# Altium PCB PCB_Project.PcbDoc
Units mil, origin at the board's own origin, x right, y up, seen from the top; angles counter-clockwise.
Board outline 7955 x 4970 mil, 2 copper layers (Top Layer, Bottom Layer); 52 components, 60 nets, 154 pads, 24 vias.
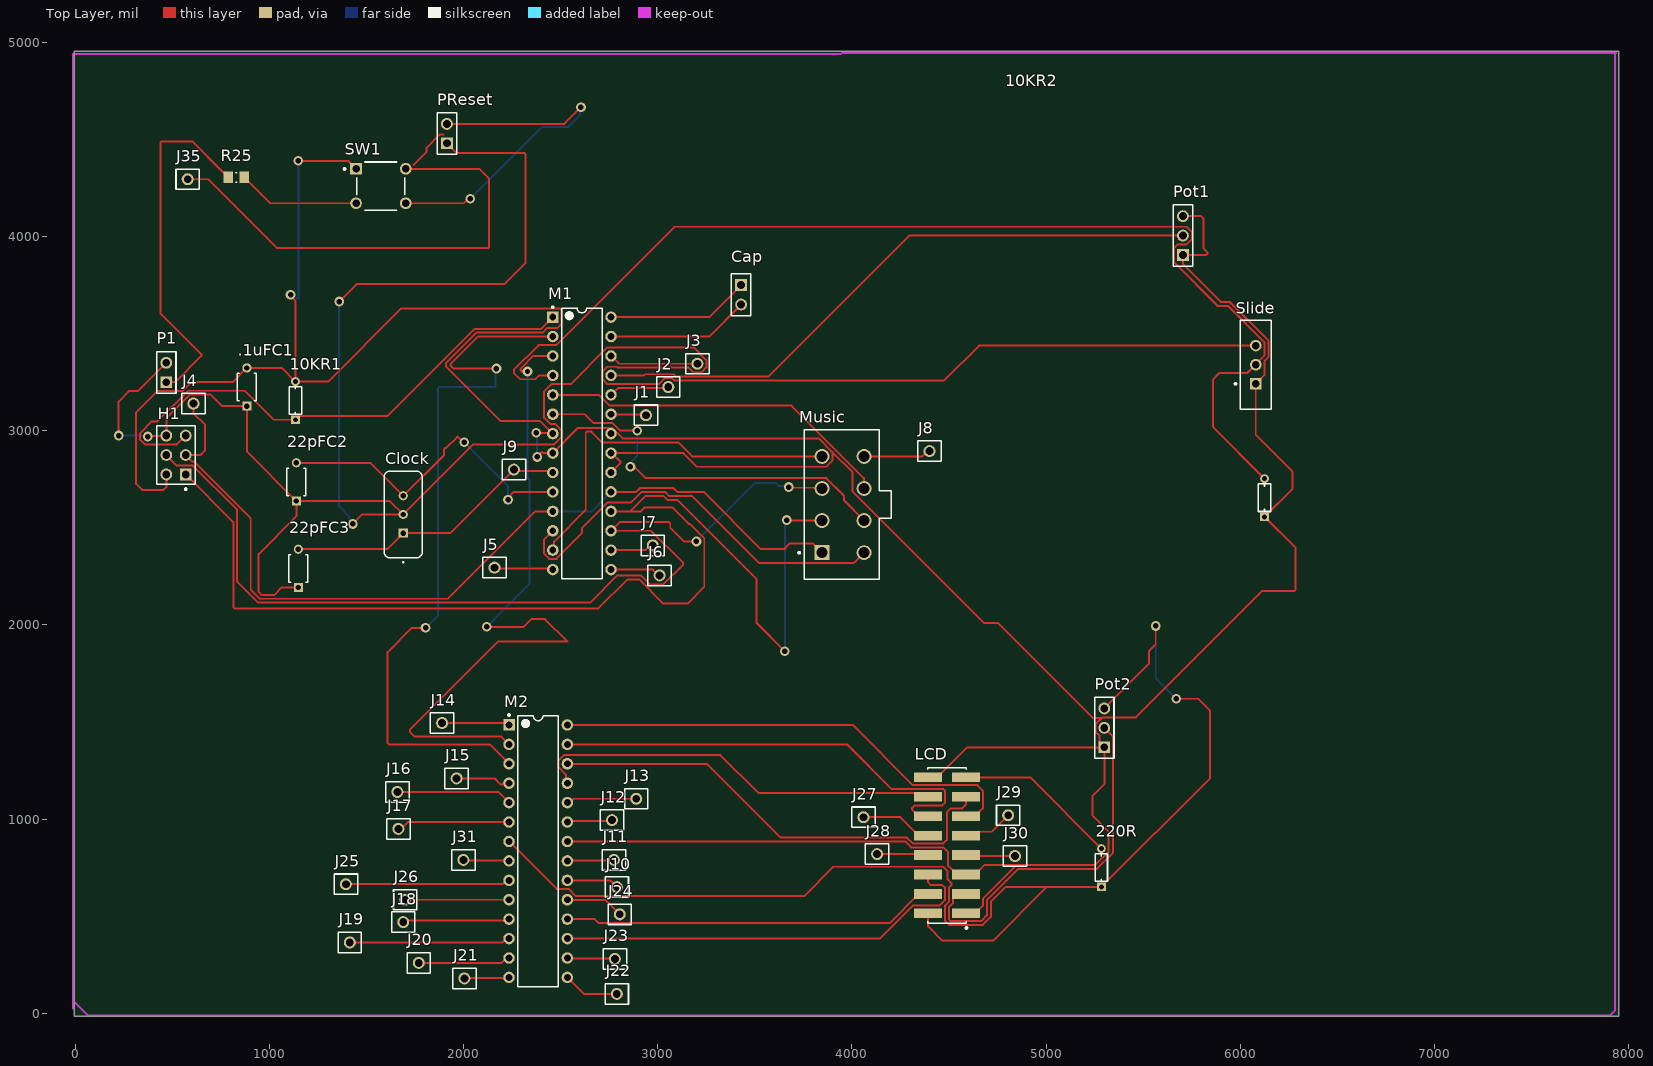
[diagram p0: Top Layer view]
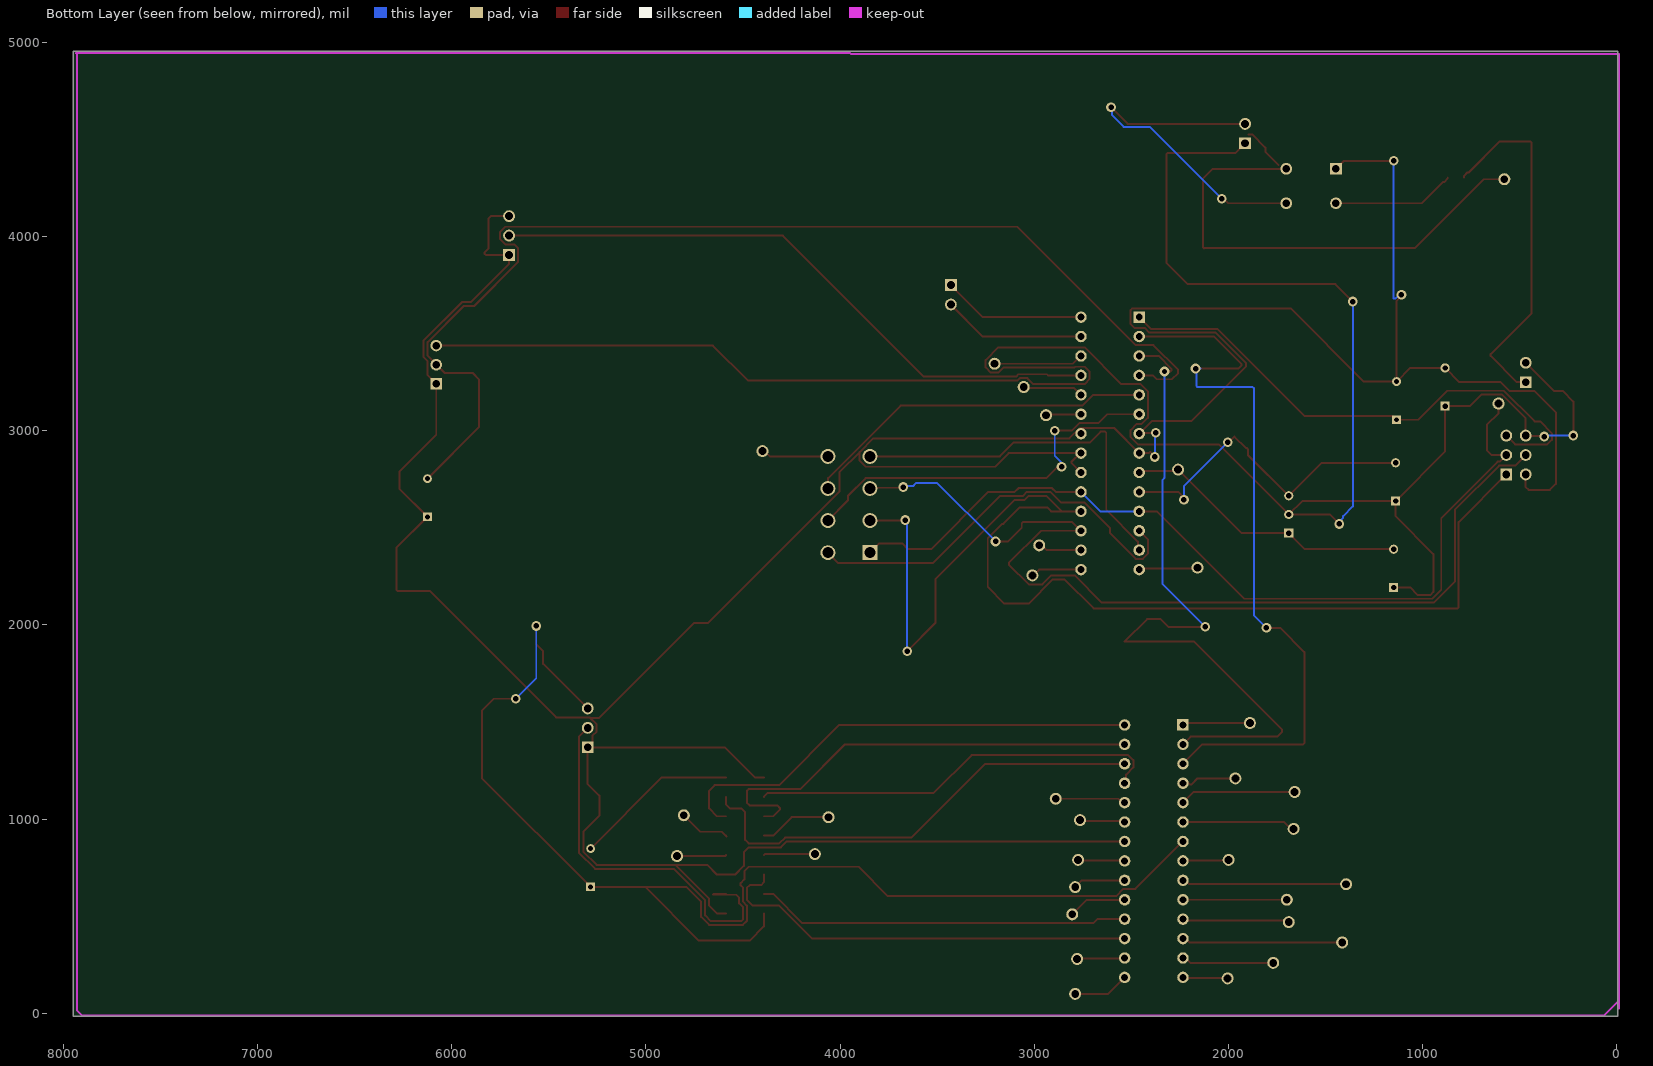
[diagram p1: Bottom Layer view, seen from below]
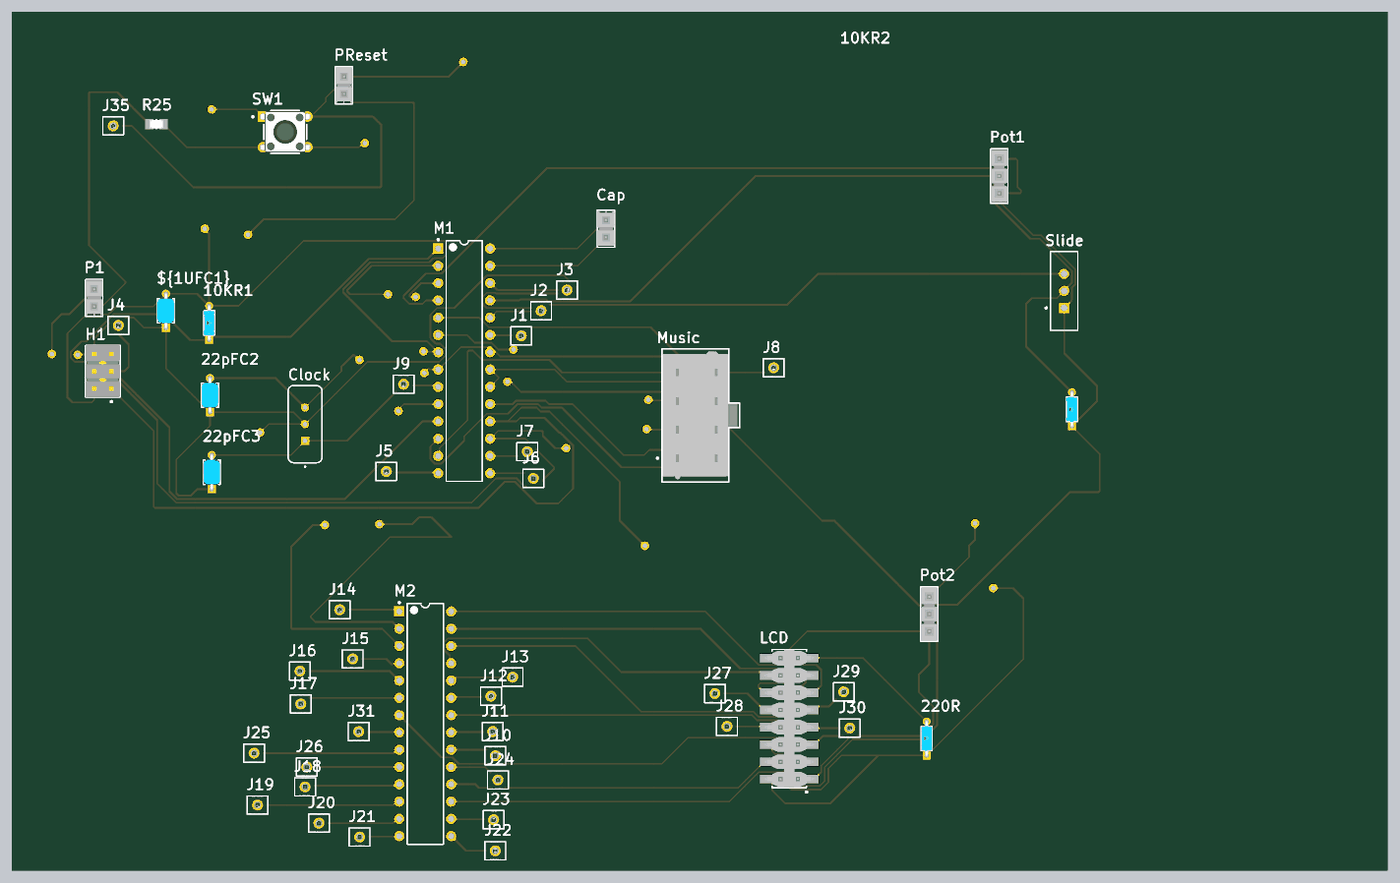
[diagram p2: 3D render of the assembled board from above, using the file's embedded part models]

## Layer stack, top to bottom
Top Solder: solder mask 0.4, Solder Resist, Dk 3.5
Top Layer: signal copper 1.4
Dielectric 1: dielectric 12.6, FR-4, Dk 4.8
Bottom Layer: signal copper 1.4
Bottom Solder: solder mask 0.4, Solder Resist, Dk 3.5

## Board outline
-5,-15 7950,-15 7950,4955 -5,4955

## Design rules (kind name [scope] priority, off if disabled: settings)
Clearance [All] p1: gap=10 ignorepadtopadclearanceinfootprint=FALSE except(0: Arc-Hole Track-Hole SMDPad-Hole THPad-Hole Via-Hole Fill-Hole Poly-Hole Region-Hole Text-Hole)
HoleToHoleClearance [All] p1: gap=0 allowstackedmicrovias=TRUE
PolygonConnect [All] p1: connectstyle=Relief reliefconductorwidth=10 reliefentries=4 polygonreliefangle="90 Angle" airgapwidth=10
RoutingVias [All] p1: holewidth=28 width=50 viastyle="Through Hole" minholewidth=28 minwidth=50 maxholewidth=28 maxwidth=50
SilkToSilkClearance [All] p1: silktosilkclearance=0
SilkToSolderMaskClearance [IsPad] p1: minsilkscreentomaskgap=0 clearancetoexposedcopper=TRUE
SolderMaskExpansion [All] p1: expansion=4 istentingtop=FALSE
Width [All] p1: maxlimit=10 minlimit=10 preferedwidth=10
27 further rules are at their usual default settings.

## Components (designator, comment, footprint, x,y, rotation, side; value= is the part's Value field where it differs from the comment)
10KR1 "MBA02040C2200FC100" FP-MBA0204-MFG 1135,3155 r90 top value=220Ω
10KR2 "MBA02040C2200FC100" FP-MBA0204-MFG 6125,2655 r90 top value=220Ω
22pFC2 "RCE5C1H220J0M1H03A" FP-RCE0K1-MFG 1140,2736.57 r90 top
22pFC3 "RCE5C1H220J0M1H03A" FP-RCE0K1-MFG 1150,2291.57 r90 top
220R "MBA02040C2200FC100" FP-MBA0204-MFG 5285,750 r90 top value=220Ω
.1uFC1 "RCE5C1H220J0M1H03A" FP-RCE0K1-MFG 885,3225 r90 top
Cap "TSW-102-26-G-S" SMTC-TSW-102-26-XX-S 3430,3750 r270 top
Clock "ECS-200-20-4X" ECS-4X-3IL 1690,2568.94 r90 top
H1 "TSW-103-08-L-D" SMTC-TSW-103-08-L-D_V 520,2875 r90 top
J1 "PBC01SAAN" FP-PBC01SAAN-MFG 2940,3080 r0 top
J2 "PBC01SAAN" FP-PBC01SAAN-MFG 3055,3225 r0 top
J3 "PBC01SAAN" FP-PBC01SAAN-MFG 3205,3345 r0 top
J4 "PBC01SAAN" FP-PBC01SAAN-MFG 610,3140 r0 top
J5 "PBC01SAAN" FP-PBC01SAAN-MFG 2160,2295 r0 top
J6 "PBC01SAAN" FP-PBC01SAAN-MFG 3010,2255 r0 top
J7 "PBC01SAAN" FP-PBC01SAAN-MFG 2975,2410 r0 top
J8 "PBC01SAAN" FP-PBC01SAAN-MFG 4400,2895 r0 top
J9 "PBC01SAAN" FP-PBC01SAAN-MFG 2260,2800 r0 top
J10 "PBC01SAAN" FP-PBC01SAAN-MFG 2790,650 r0 top
J11 "PBC01SAAN" FP-PBC01SAAN-MFG 2775,790 r0 top
J12 "PBC01SAAN" FP-PBC01SAAN-MFG 2765,995 r0 top
J13 "PBC01SAAN" FP-PBC01SAAN-MFG 2890,1105 r0 top
J14 "PBC01SAAN" FP-PBC01SAAN-MFG 1890,1495 r0 top
J15 "PBC01SAAN" FP-PBC01SAAN-MFG 1965,1210 r0 top
J16 "PBC01SAAN" FP-PBC01SAAN-MFG 1660,1140 r0 top
J17 "PBC01SAAN" FP-PBC01SAAN-MFG 1665,950 r0 top
J18 "PBC01SAAN" FP-PBC01SAAN-MFG 1690,470 r0 top
J19 "PBC01SAAN" FP-PBC01SAAN-MFG 1415,365 r0 top
J20 "PBC01SAAN" FP-PBC01SAAN-MFG 1770,260 r0 top
J21 "PBC01SAAN" FP-PBC01SAAN-MFG 2005,180 r0 top
J22 "PBC01SAAN" FP-PBC01SAAN-MFG 2790,100 r0 top
J23 "PBC01SAAN" FP-PBC01SAAN-MFG 2780,280 r0 top
J24 "PBC01SAAN" FP-PBC01SAAN-MFG 2805,510 r0 top
J25 "PBC01SAAN" FP-PBC01SAAN-MFG 1395,665 r0 top
J26 "PBC01SAAN" FP-PBC01SAAN-MFG 1700,585 r0 top
J27 "PBC01SAAN" FP-PBC01SAAN-MFG 4060,1010 r0 top
J28 "PBC01SAAN" FP-PBC01SAAN-MFG 4130,820 r0 top
J29 "PBC01SAAN" FP-PBC01SAAN-MFG 4805,1020 r0 top
J30 "PBC01SAAN" FP-PBC01SAAN-MFG 4840,810 r0 top
J31 "PBC01SAAN" FP-PBC01SAAN-MFG 2000,790 r0 top
J35 "PBC01SAAN" FP-PBC01SAAN-MFG 580,4295 r0 top
LCD "TSM-108-01-T-DV" SMTC-TSM-108-01-X-DV 4490,865 r90 top
M1 "ATmega328-PU" 28P3 2610,2935 r0 top
M2 "ATmega328-PU" 28P3 2385,835 r0 top
Music "39-28-1083" MOLX-39-28-1083_V 3955,2620 r90 top
P1 "TSW-102-26-G-S" SMTC-TSW-102-26-XX-S 470,3250 r90 top
Pot1 "TSW-103-07-T-S" SMTC-TSW-103-07-X-S 5705,3905 r90 top
Pot2 "TSW-103-07-T-S" SMTC-TSW-103-07-X-S 5300,1370 r90 top
PReset "TSW-102-26-G-S" SMTC-TSW-102-26-XX-S 1915,4480 r90 top
R25 "CRCW080510K0FKEA" FP-CRCW0805-e3-IPC_A 830,4305 r0 top
Slide "EG1218" ESWI-EG1218_V 6080,3340 r90 top
SW1 "3-1825910-1" FP-3-1825910-1-MFG 1575,4260 r0 top

## Footprints (in the part's own frame and the unit in brackets; to place one, negate y for a bottom-side part, rotate by r counter-clockwise, add the part's x,y. Pads: shape width x height; smd on the part's side, far side on the other; paste and mask are expansions set on the pad)
28P3 [mm] "28-Pin Plastic Dual In-Line Package (PDIP)"
  rect 1.5x1.5 hole 0.9: 1(-3.81,16.51)
  round 1.5 hole 0.9: 2(-3.81,13.97) 3(-3.81,11.43) 4(-3.81,8.89) 5(-3.81,6.35) 6(-3.81,3.81) 7(-3.81,1.27) 8(-3.81,-1.27) 9(-3.81,-3.81) 10(-3.81,-6.35) 11(-3.81,-8.89) 12(-3.81,-11.43) 13(-3.81,-13.97) 14(-3.81,-16.51) 15(3.81,-16.51) 16(3.81,-13.97) 17(3.81,-11.43) 18(3.81,-8.89) 19(3.81,-6.35) 20(3.81,-3.81) 21(3.81,-1.27) 22(3.81,1.27) 23(3.81,3.81) 24(3.81,6.35) 25(3.81,8.89) 26(3.81,11.43) 27(3.81,13.97) 28(3.81,16.51)
  silkscreen extent -3.93,-17.7 2.65,17.93, body extent -3.6,-17.65 3.6,17.65, height 4.58
ECS-4X-3IL [mm]
  rect 1.2x1.2 hole 0.7: 1(-2.44,0)
  round 1.2 hole 0.7: 2(0,0) 3(2.44,0)
  silkscreen extent -6.34,-2.5 5.68,2.5, body extent -5.68,-2.5 5.68,2.5, height 3.5
ESWI-EG1218_V [mm] "THD, 3-Leads, Body 11.6x4mm, Pitch 2.5mm"
  rect 1.5x1.5 hole 1: 1(-2.5,0)
  round 1.5 hole 1: 2(0,0) 3(2.5,0)
  silkscreen extent -5.8,-2 5.8,2.77, body extent -5.8,-2 5.8,2, height 7.4
FP-3-1825910-1-MFG [mm]
  rect 1.54x1.54 hole 0.99 paste-1000 mask+0: 1(-3.25,2.25)
  round 1.54 hole 0.99 paste-1000 mask+0: 2(3.25,2.25) 3(-3.25,-2.25) 4(3.25,-2.25)
  silkscreen extent -4.87,-3.15 3.15,3.15, body extent -4.12,-3.24 4.12,3.24, height 0.25
FP-CRCW0805-e3-IPC_A [mil]
  rect 47.5x59.38 smd paste+0 mask+0: 1(-41.37,0) 2(41.37,0)
  silkscreen extent -3,-25 3,25, body extent -85,-49 85,49, height 10
FP-MBA0204-MFG [mm]
  rect 1.15x1.15 hole 0.65 paste-1000 mask+0: 1(-2.5,0)
  round 1.15 hole 0.65 paste-1000 mask+0: 2(2.5,0)
  silkscreen extent -1.8,-0.8 1.8,0.8, body extent -3.17,-0.9 3.17,0.9, height 0.25
FP-PBC01SAAN-MFG [mm]
  round 1.57 hole 1.02 paste-1000 mask+0: 1(0,0)
  silkscreen extent -1.53,-1.34 1.53,1.34, body extent -1.63,-1.44 1.63,1.44, height 0.25
FP-RCE0K1-MFG [mm]
  rect 1.2x1.2 hole 0.7 paste-1000 mask+0: 1(-2.5,0)
  round 1.2 hole 0.7 paste-1000 mask+0: 2(2.5,0)
  silkscreen extent -1.8,-1.25 1.8,1.25, body extent -3.2,-1.35 3.2,1.35, height 0.25
MOLX-39-28-1083_V [mm] "PCB Header, 8-Leads, Vertical, Pitch 4.2 mm, Through Hole"
  rect 1.95x1.95 hole 1.45: 1(-6.3,2.75)
  round 1.95 hole 1.45: 2(-2.1,2.75) 3(2.1,2.75) 4(6.3,2.75) 5(-6.3,-2.75) 6(-2.1,-2.75) 7(2.1,-2.75) 8(6.3,-2.75)
  silkscreen extent -9.8,-6.3 9.8,5.87, body extent -9.4,-6 9.4,5, height 12.8
SMTC-TSM-108-01-X-DV [mm] "Double Row Gullwing ASM, 2x8 Pins, Vertical, 2.54mm Pitch, Male"
  rect 1.27x3.68 smd: 1(-8.89,-2.475) 2(-8.89,2.475) 3(-6.35,-2.475) 4(-6.35,2.475) 5(-3.81,-2.475) 6(-3.81,2.475) 7(-1.27,-2.475) 8(-1.27,2.475) 9(1.27,-2.475) 10(1.27,2.475) 11(3.81,-2.475) 12(3.81,2.475) 13(6.35,-2.475) 14(6.35,2.475) 15(8.89,-2.475) 16(8.89,2.475)
  silkscreen extent -10.92,-2.67 10.16,2.54, body extent -10.16,-3.68 10.16,3.68, height 9.65
SMTC-TSW-102-26-XX-S [mm] ".025 SQ Post Terminal Strip Assembly, 1x2 Pins, Vertical, 2.54mm Pitch, Male"
  rect 1.55x1.55 hole 1.02: 1(0,0)
  round 1.55 hole 1.02: 2(2.54,0)
  silkscreen extent -1.46,-1.27 4,1.27, body extent -1.4,-1.27 3.81,1.27, height 8.38
SMTC-TSW-103-07-X-S [mm] ".025 SQ Post Terminal Strip Assembly, 1x3 Pins, Vertical, 2.54mm Pitch, Male"
  rect 1.55x1.55 hole 1.02: 1(0,0)
  round 1.55 hole 1.02: 2(2.54,0) 3(5.08,0)
  silkscreen extent -1.46,-1.27 6.54,1.27, body extent -1.27,-1.27 6.35,1.27, height 8.38
SMTC-TSW-103-08-L-D_V [mm] "CONN, 6-Leads, Body 7.62x5.08mm, Pitch 2.54mm"
  rect 1.55x1.55 hole 1.02: 1(-2.54,-1.27)
  round 1.55 hole 1.02: 2(-2.54,1.27) 3(0,-1.27) 4(0,1.27) 5(2.54,-1.27) 6(2.54,1.27)
  silkscreen extent -4.58,-2.54 3.81,2.54, body extent -3.81,-2.54 3.81,2.54, height 8.38

## Part data
10KR1 10KR2 220R: library part CMP-02408-000005-1, "RES 220 OHM 0.4W 1% AXIAL", Manufacturer="Vishay BC Components", Package=MBA0204, Power Rating=0.25W, Resistance=220Ω, Temperature="-55°C to +125°C", Temperature Coefficient=50ppm/°C, Temperature Range High=+125°C, Temperature Range Low=-55°C, Tolerance=1%, Voltage Rating=200V, Automotive=Yes, Automotive Grade="Grade 1", Category=Res, ComponentLink2Description=Datasheet, ComponentLink2URL=http://www.vishay.com/docs/28766/mbxsma.pdf, Composition="Metal Film", Device Class L1="Passive Components", Device Class L2=Resistors, Device Class L3="Through-Hole Resistors", Digikey Description="RES 220 OHM 0.4W 1% AXIAL", Height=1.6mm, Ipc Land Pattern Name=RESAD500W65L360D160, Lead Free=Yes, Manufacturer Part Number=MBA02040C2200FC100, Mouser Description="Thin Film Resistors - Through Hole .4watt 220ohms 1% 1/8watt body size", Octopart=https://octopart.com/mba02040c2200fc100-vishay-43743094, RoHS=TRUE, Series="MBA/SMA 0204"
22pFC2 22pFC3 .1uFC1: library part CMP-06035-004895-1, "Cap Ceramic 22pF 50V C0G ±5% Radial 5mm +125°C Automotive Bulk", Capacitance=22pF, Case/Package=Radial, Dielectric=C0G, Max Operating Temperature=125°C, Min Operating Temperature=-55°C, Package Quantity=2000, Ratings=AEC-Q200, Resistor Type=Ceramic, Tolerance=5%, Voltage Rating=50V, Height=3.5mm, Height - Seated (Max)=0.138inch, Lead Diameter=0.5mm, Lead Pitch=0.197inch, Lead/Base Style="Formed Leads", Length=0.142inch, Mount="Through Hole", Packaging="Tape and Reel", Termination=Radial, Voltage Rating (DC)=50V, Width=0.098inch
Cap P1 PReset: library part CMP-1024-00327-1, "0.025\" SQ Post Header, Through-hole, Vertical, -55 to 125 degC, 2.54 mm Pitch, 2-Pin, Male, RoHS", Manufacturer=Samtec, Temperature Range="-55 to 125 degC", ComponentLink1Description="Manufacturer URL", ComponentLink1URL=http://www.samtec.com, ComponentLink2Description=Datasheet, ComponentLink2URL=http://www.samtec.com/documents/webfiles/pdf/TSW_TH.PDF, ComponentLink3Description="Package Specification", ComponentLink3URL=http://www.samtec.com/documents/webfiles/cpdf/TSW-XXX-XX-XXX-X-XX-XXX-MKT.pdf, DatasheetVersion=F-214, Mounting Technology=Through-hole, Orientation=Vertical, PackageDescription=".025[0.64] SQ. Post Terminal Strip Assembly", PackageReference=TSW-102-26-XX-S, PackageVersion="DM, 8/1988", PartNumber=TSW-102-26-G-S, Pitch="2.54 mm", RoHS=True
Clock: library part CMP-1669-00001-2, "CRYSTAL 20.000MHZ 20PF 49US", Manufacturer=ECS, ComponentLink1Description=Datasheet, ComponentLink1URL=http://www.ecsxtal.com/store/pdf/hc-49usx.pdf, PackageReference=4X-3IL, PartNumber=ECS-200-20-4X
H1: library part CMP-1024-00336-5, "Male Header, Pitch 2.54 mm, 2 x 3 Position, Height 8.38 mm, Tail Length 5.08 mm, -55 to 125 degC, RoHS, Bulk", Manufacturer=Samtec, Max Operating Temperature="125 degC", Min Operating Temperature="-55 degC", ComponentLink1Description="Manufacturer URL", ComponentLink1URL=http://www.samtec.com/, ComponentLink2Description=Datasheet, ComponentLink2URL=https://datasheet.ciiva.com/25618/0900766b81154476-25618436.pdf, ComponentLink3Description="Package Specification", ComponentLink3URL=http://suddendocs.samtec.com/prints/tsw-xxx-xx-x-x-xx-xxx-footprint.pdf, DatasheetVersion=04/2012, Lead Pitch="2.54 mm", Mount="Through Hole", Mounting Technology="Through Hole", PackageDescription="Male Header, Pitch 2.54 mm, 2 x 3 Position, Height 8.38 mm, Tail Length 5.08 mm", PackageReference=TSW-103-08-L-D, RoHSCompliant=true
J1 J2 J3 J4 J5 J6 J7 J8 J9 J10 J11 J12 J13 J14 J15 J16 J17 J18 J19 J20 J21 J22 J23 J24 J25 J26 J27 J28 J29 J30 J31 J35: library part CMP-25680-000032-1, "CONN HEADER VERT 1POS", Color=Black, Package Quantity=1, Connector Type="Male Pin", Contact Material=Bronze, Contact Mating Length=0.23inch, Contact Plating=Gold, Gender=Male, Height=2.54mm, Housing Color=Black, Housing Material=Plastic, Lead Free="Lead Free", Length=2.54mm, Mount="Through Hole", Number of Contacts=1, Number of Positions=1, Number of Rows=1, Packaging=Bulk, Pitch=2.54mm, Termination=Solder, Width=2.54mm
LCD: library part CMP-1024-00271-1, "0.025\" SQ Post Header, Surface Mount, Vertical, -55 to 105 degC, 2.54 mm Pitch, 16-Pin, Male, RoHS", Manufacturer=Samtec, Temperature Range="-55 to 105 degC", ComponentLink1Description="Manufacturer URL", ComponentLink1URL=http://www.samtec.com, ComponentLink2Description=Datasheet, ComponentLink2URL=http://www.samtec.com/documents/webfiles/pdf/TSM.PDF, ComponentLink3Description="Package Specification", ComponentLink3URL=http://www.samtec.com/documents/webfiles/cpdf/TSM-1XX-XX-XXX-XX-X-XXX-X-MKT.pdf, DatasheetVersion=F-214, Mounting Technology="Surface Mount", Orientation=Vertical, PackageDescription="Double Row Gullwing ASM", PackageReference=TSM-108-01-X-DV, PackageVersion="DJ, 4/1991", PartNumber=TSM-108-01-T-DV, Pitch="2.54 mm", RoHS=True
M1 M2: library part CMP-0095-00015-2, "8-bit AVR Microcontroller, 32KB Flash, 1KB EEPROM, 2KB SRAM, 28-pin PDIP, Industrial Grade (-40°C to 85°C)", ComponentLink1Description="Manufacturer URL", ComponentLink1URL=http://www.atmel.com/, ComponentLink2Description="ATmega48A/48PA/88A/88PA/168A/168PA/328/328P Datasheet", ComponentLink2URL=http://www.atmel.com/dyn/resources/prod_documents/8271.pdf, ComponentLink3Description="ATmega48A/48PA/88A/88PA/168A/168PA/328/328P Summary", ComponentLink3URL=http://www.atmel.com/dyn/resources/prod_documents/8271S.pdf, DatasheetVersion="revD, May-2011", PackageDescription="28-lead (0.300\"/7.62mm Wide) Plastic Dual Inline Package (PDIP)", PackageReference=28P3, PackageVersion="revB, Sep-2001", RevisionNote="DatasheetVersion updated. URLs added."
Music: library part CMP-1594-00002-1, "4.2 mm Pitch Mini-Fit Jr.Power Connector, Vertical, Through Hole, 8 Circuits, -40 to 105 degC, RoHS, Bag", Temperature Max="105 degC", Temperature Min="-40 degC", ComponentLink1Description="Manufacturer URL", ComponentLink1URL=http://www.molex.com/, ComponentLink2Description=Datasheet, ComponentLink2URL=http://www.molex.com/webdocs/datasheets/pdf/en-us/0039281083_PCB_HEADERS.pdf, ComponentLink3Description="Package Specification", ComponentLink3URL=http://www.molex.com/pdm_docs/sd/039281083_sd.pdf, Mounting Technology="Surface Mount", No. of Positions=8, No. of Rows=2, Orientation=Vertical, PackageDescription="8-Pin PCB Header, Vertical, Pitch 4.2 mm, Through Hole", PackageVersion="Rev. F, 06/2009", Packing=Bag, PartNumber=39-28-1083, Pitch="4.2 mm", RoHS=TRUE
Pot1 Pot2: library part CMP-1024-00332-1, "0.025\" SQ Post Header, Through-hole, Vertical, -55 to 105 degC, 2.54 mm Pitch, 3-Pin, Male, RoHS", Manufacturer=Samtec, Temperature Range="-55 to 105 degC", ComponentLink1Description="Manufacturer URL", ComponentLink1URL=http://www.samtec.com, ComponentLink2Description=Datasheet, ComponentLink2URL=http://www.samtec.com/documents/webfiles/pdf/TSW_TH.PDF, ComponentLink3Description="Package Specification", ComponentLink3URL=http://www.samtec.com/documents/webfiles/cpdf/TSW-XXX-XX-XXX-X-XX-XXX-MKT.pdf, DatasheetVersion=F-214, Mounting Technology=Through-hole, Orientation=Vertical, PackageDescription=".025[0.64] SQ. Post Terminal Strip Assembly", PackageReference=TSW-103-07-X-S, PackageVersion="DM, 8/1988", PartNumber=TSW-103-07-T-S, Pitch="2.54 mm", RoHS=True
R25: library part CMP-2001-04908-2, "RES Thick Film, 10kΩ, 1%, 0.125W, 100ppm/°C, 0805", Case Code (Imperial)=0805, Case Code (Metric)=2012, Max Operating Temperature=155°C, Min Operating Temperature=-55°C, Package Quantity=5000, Power Rating=125mW, Resistance=10kR, Temperature Coefficient=100ppm/°C, Tolerance=1%, Voltage Rating=150V, Case/Package=0805, Composition="Thick Film", Contact Plating=Tin, Depth=1.25mm, Height=0.45mm, Lead Free="Lead Free", Length=2mm, Military Standard=Not, Packaging="Tape and Reel", Radiation Hardening=No, Termination=SMD/SMT, Voltage Rating (DC)=150V, Weight=0.000194oz, Width=1.25mm
Slide: library part CMP-1696-00002-1, "Slide Switch, 500 V, -20 to 70 degC, 3-Pin THD, RoHS", Case\Package=SOT-23-5, Dropout Voltage="300 mV", Max Input Voltage="8 V", Max Operating Temperature="85 degC", Max Ouput Current="150 mA", Max Power Dissipation="250 mW", Min Input Voltage="4.3 V", Min Operating Temperature="-40 degC", Nominal Output Voltage="3.3 V", Package Quantity=3000, ComponentLink1Description="Manufacturer URL", ComponentLink1URL=http://www.e-switch.ch/en/, ComponentLink2Description=Datasheet, ComponentLink2URL=https://www.e-switch.com/system/asset/product_line/data_sheet/119/EG.pdf, DatasheetVersion=Oct-15, Height="1.3 mm", Length="3 mm", Mount="Surface Mount", Output Current="150 mA", Output Voltage="3.3 V", Outputs=1, PackageDescription="3-Pin Through Hole Device, Body 11.6 x 4 mm, Pitch 2.5 mm", PackageReference=EG1218, Packaging="Tape and Reel", Pins=5, Power Rating="250 mW", Radiation Hardening=No, REACH SVHC="No SVHC", RoHSCompliant=true, Width="1.8 mm"
SW1: library part CMP-03407-000001-1, "SWITCH TACTILE SPST-NO 0.05A 24V", Contact Current Rating=50mA, Contact Resistance=100mΩ, Manufacturer="TE Connectivity", Operating Force=160gf, Package=0, Temperature="-35°C to +85°C", Temperature Range High=+85°C, Temperature Range Low=-35°C, Automotive=No, Category=Switch, ComponentLink2Description=Datasheet, ComponentLink2URL=https://www.te.com/commerce/DocumentDelivery/DDEController?Action=srchrtrv&DocNm=1825910&DocType=Customer+Drawing&DocLang=English, Device Class L1=Electromechanical, Device Class L2=Switches, Device Class L3="Tactile Switches", Digikey Description="SWITCH TACTILE SPST-NO 0.05A 24V", Electromechanical Life=100000Cycles, Height=17.3mm, Lead Free=Yes, Manufacturer Part Number=3-1825910-1, Mount="Through Hole", Octopart=https://octopart.com/3-1825910-1-te+connectivity-46506874, RoHS=TRUE, Throw Configuration=SPST-NO

## Via types
v1: diameter 50, hole 28, Top Layer to Bottom Layer, 24 vias

## Nets (pads, with @x,y where several pads share a name; then routed paths per layer and width w, separated by ;. In a path a pad name is that pad's centre, name@x,y a point inside that pad or via, vN(x,y) a via of type N, cw(c..) or ccw(c..) an arc to the next point about the centre after c; other vN are vias at no path point)
GND: 22pFC2.1 22pFC3.1 .1uFC1.1 Clock.2 H1.6 P1.2 PReset.1 Slide.3 | length 13101.1
  Top Layer w10: v1(225,2975) 225,3150 280,3205 325,3205 P1.2 ; v1(375,2970) 377.5,2972.5 467.5,2972.5 H1.6 470,3064.92 590.99,3185.91 699.02,3185.91 758.35,3126.57 .1uFC1.1 885,2893.15 22pFC2.1 ; 22pFC3.1 1065.62,2193.15 1027.47,2155 960,2155 945,2170 945,2365 1140,2560 22pFC2.1 ; v1(1360,3665) 1450,3755 2210,3755 2320,3865 2320,4424.14 2314.14,4430 1965,4430 PReset.1 ; v1(1430,2520) 1478.94,2568.94 Clock.2 ; Slide.3 4655.23,3438.43 4475.9,3259.09 3085.83,3259.09 3074.01,3270.91 3035.99,3270.91 3005.55,3240.47 2741.56,3240.47 2715.47,3266.56 2715.47,3303.44 2741.56,3329.53 2789.99,3329.53 2794.51,3325 3160.08,3325 3185.99,3299.09 3224.01,3299.09 3250.91,3325.99 3250.91,3364.01 3185.39,3429.53 2741.56,3429.53 2552.5,3240.47 2452.5,3240.47 2415.47,3203.44 2415.47,3066.56 2447.03,3035 2472.97,3035 2504.53,3003.44 2504.53,2966.56 2467.5,2929.53 2050.59,2929.53 Clock.2 ; 22pFC2.1 1620.79,2638.15 Clock.2
  Bottom Layer w10: v1(225,2975) 365,2975 370,2970 v1(375,2970) ; v1(1360,3665) 1360,2610 1410,2560 1410,2550.82 1430,2530.82 v1(1430,2520)
Net10KR1_1: 10KR1.1 H1.5 M1.1 | length 2793.5
  Top Layer w10: H1.5 524.49,2929.49 358.94,2929.49 335,2953.43 335,2986.57 396.12,3047.69 424.49,3047.69 582.7,3205.91 874.13,3205.91 1023.46,3056.57 10KR1.1 1152.64,3074.21 1157.71,3074.21 1158.5,3075 1608.43,3075 2058.43,3525 2400,3525 M1.1
Net10KR1_2: 10KR1.2 10KR2.1 .1uFC1.2 H1.2 LCD.1 LCD.5 LCD.16 M1.7 M1.8 M1.20 M1.21 M1.22 M2.22 Pot1.1 Pot1.3 Pot2.1 Slide.1 SW1.1 | length 20246.1
  Top Layer w10: H1.2 470,2710 455,2695 345.86,2695 315,2725.86 315,3095 424.49,3204.49 553,3204.49 598.51,3250 811.57,3250 .1uFC1.2 1065,3323.43 10KR1.2 ; v1(1110,3700) 1110,3693.43 1135,3668.43 10KR1.2 ; v1(1150,4390) 1405.63,4390 SW1.1 ; v1(2375,2990) 2377.5,2987.5 M1.7@2457.5,2987.5 ; v1(2380,2865) 2380,2866.72 2404.14,2890.86 2410,2885 M1.8 2590,3015 2764.69,3015 2819.21,2960.47 3829.79,2960.47 3900.12,2890.14 ; M1.7 M1.7@2457.5,2987.5 ; M2.22 4275.62,885 4305.62,855 4471.21,855 4495.61,830.61 4495.61,759.39 4540,715 LCD.5 4634.88,715 4683.98,764.09 4848.3,764.09 ; M1.20 2808.36,2833.36 2808.36,2841.64 M1.21@2765,2885 ; M1.21 M1.21@2765,2885 ; LCD.16 4440,1215 4595,1370 Pot2.1 ; LCD.1 4634.88,515 4675.77,555.89 4675.77,591.57 4848.3,764.09 ; Pot1.3 5799.14,4105 5810,4094.14 5810,3940 5830.86,3919.14 5830.86,3910.86 5825,3905 Pot1.1 5705,3859.49 5902.17,3662.32 5947.36,3662.32 6144.53,3465.15 6144.53,3378.44 6124.53,3358.44 6124.53,3286.1 Slide.1 6080,2980 6270,2790 6270,2701.57 10KR2.1 6285,2396.57 6285,2180.86 6279.14,2175 6112.82,2175 5462.31,1524.49 5290.12,1524.49 5285.64,1520 ; 10KR1.2 1303.57,3253.43 1679.67,3629.53 2495.74,3629.53 2504.53,3620.74 2504.53,3549.26 2484.8,3529.53 2432.81,3529.53 2408.28,3505 2066.72,3505 1910,3348.28 1910,3331.72 2192.19,3049.53 2395.47,3049.53 M1.7@2457.5,2987.5 ; M1.21@2765,2885 3132.18,2885 3202.54,2814.65 3868.85,2814.65 3900.12,2845.92 3900.12,2890.14 ; 3900.12,2890.14 4002.51,2787.75 4002.51,2687.93 4680.38,2010.07 4752.34,2010.07 5242.4,1520 5285.64,1520 ; 4848.3,764.09 5253.9,764.09 5322.64,832.84 5322.64,935.78 5240.35,1018.07 5240.35,1121.02 5300,1180.67 Pot2.1 ; 5285.64,1520 5254.49,1488.85 5254.49,1451.15 5274.49,1431.15 5274.49,1395.51 Pot2.1
  Bottom Layer w10: v1(1110,3700) 1120.82,3700 1140.82,3680 1150,3680 v1(1150,4390) ; v1(2375,2990) 2380,2985 v1(2380,2865)
Net10KR2_2: 10KR2.2 M1.4 Slide.2 | length 5908.2
  Top Layer w10: M1.4 2390.08,3285 2370.08,3265 2291.72,3265 2260,3296.72 2260,3313.28 2387.19,3440.47 2478.44,3440.47 3088.48,4050.51 5723.85,4050.51 5750.51,4023.85 5750.51,3986.15 5723.85,3959.49 5677.25,3959.49 5659.49,3941.73 5659.49,3868.27 5885.44,3642.32 5939.08,3642.32 6124.53,3456.87 6124.53,3386.73 6080,3342.2 Slide.2 6037.38,3297.38 5893.24,3297.38 5860,3264.14 5860,3018.43 10KR2.2
Net22pFC2_2: 22pFC2.2 Clock.3 M1.10 | length 1721.9
  Top Layer w10: 22pFC2.2 1520,2835 Clock.3 1900,2875 1900,2904.14 1905.86,2910 1910,2910 1970,2970 1999.75,2940.25 v1(2004.75,2940.25) ; v1@2230,2655 2260,2685 M1.10
  Bottom Layer w10: v1(2004.75,2940.25) 2230,2715 v1(2230,2645)
Net22pFC3_2: 22pFC3.2 Clock.1 J9.1 M1.9 | length 1486
  Top Layer w10: 22pFC3.2 1607.13,2390 Clock.1 1932.87,2472.87 J9.1 2267.5,2792.5 2452.5,2792.5 M1.9
Net220R_1: 220R.1 LCD.2 M2.7 Pot2.3 | length 6783.5
  Top Layer w10: M2.7 2479.53,640.47 2542.5,640.47 2578.88,604.09 3754.5,604.09 3905.41,755 4471.21,755 4493.66,732.55 4493.66,690.13 4512.94,670.85 4512.94,659.15 4500,646.21 4500,583.79 4500,574.5 4480,554.5 4480,475.5 4500.5,455 4674.38,455 4715.77,496.39 4715.77,575 4792.35,651.57 5004.47,651.57 ; LCD.2 4392.56,447.44 4465,375 4727.89,375 5004.47,651.57 ; Pot2.3 5530,1800 5530,1865 5565,1900 v1(5565,1995) ; v1(5670,1620) 5784.14,1620 5845,1559.14 5845,1211.57 220R.1 5004.47,651.57
  Bottom Layer w10: v1(5565,1995) 5565,1725 v1(5670,1620)
Net220R_2: 220R.2 LCD.15 | length 849.4
  Top Layer w10: LCD.15 4918.43,1215 220R.2
NetCap_1: Cap.1 M1.28 | length 738.3
  Top Layer w10: M1.28 3265,3585 Cap.1
NetCap_2: Cap.2 M1.27 | length 738.3
  Top Layer w10: M1.27 3265,3485 Cap.2
NetH1_1: H1.1 M1.18 Music.2 | length 6317.7
  Top Layer w10: H1.1 815,2530 815,2090.86 820.86,2085 2695,2085 2845,2235 2905,2235 3030,2110 3154.14,2110 3240,2195.86 3240,2446.57 3166.57,2520 3160,2520 3074.14,2605.86 2934.14,2605.86 2913.28,2585 2860,2585 ; M1.18 2860,2585 ; v1(3655,1865) 3510,2010 3510,2235 3102.5,2642.5 3052.27,2642.5 3029.77,2665 2940,2665 2860,2585 ; v1@3667.32,2537.32 Music.2
  Bottom Layer w10: v1(3655,1865) 3655,2530 v1(3665,2540)
NetH1_3: H1.3 J4.1 M1.11 M1.19 Music.1 | length 4573
  Top Layer w10: J4.1 610,3090 670,3030 670,2900 645,2875 H1.3 604.49,2840.51 615.01,2840.51 905,2550.52 905,2181.72 951.72,2135 1919.22,2135 2369.22,2585 M1.11 ; M1.19 2889.26,2685 2909.26,2705 3081.72,2705 3101.72,2685 3236.72,2685 3531.72,2390 3650.71,2390 3680.21,2419.5 3799.2,2419.5 Music.1
  Bottom Layer w10: M1.11 2660,2585 M1.19
NetH1_4: H1.4 M1.17 Music.3 | length 5055.1
  Top Layer w10: H1.4 524.49,2820.51 606.72,2820.51 835,2592.24 835,2223.43 943.43,2115 2652.97,2115 2792.97,2255 2913.28,2255 2959.19,2209.09 3029.01,2209.09 3130.78,2310.86 3130.78,2319.14 2964.92,2485 M1.17 2805,2530 3059.14,2530 3065,2524.14 3065,2500 3135,2430 v1(3200,2430) ; v1(3675,2710) 3678.66,2706.34 3843.07,2706.34 Music.3
  Bottom Layer w10: v1(3200,2430) 3500,2730 3610,2730 3625,2715 3670,2715 v1(3675,2710)
NetJ1_1: J1.1 M1.23 | length 182.1
  Top Layer w10: M1.23 2762.5,3082.5 2937.5,3082.5 J1.1
NetJ2_1: J2.1 M1.24 | length 311.6
  Top Layer w10: M1.24 2762.8,3185 2798.27,3220.47 3050.47,3220.47 J2.1
NetJ3_1: J3.1 M1.26 | length 461.6
  Top Layer w10: M1.26 2762.8,3385 2802.8,3345 J3.1
NetJ5_1: J5.1 M1.14 | length 304.1
  Top Layer w10: J5.1 2165,2290 2455,2290 M1.14
NetJ6_1: J6.1 M1.15 | length 262.4
  Top Layer w10: M1.15 2975.08,2285 3005.08,2255 J6.1
NetJ7_1: J7.1 M1.16 | length 225.4
  Top Layer w10: M1.16 2935.98,2385 2960.98,2410 J7.1
NetJ8_1: J8.1 Music.8 | length 347.9
  Top Layer w10: Music.8 4362.05,2868.03 4389.02,2895 J8.1
NetJ10_1: J10.1 M2.20 | length 269.5
  Top Layer w10: M2.20 2755,685 J10.1
NetJ11_1: J11.1 M2.21 | length 242.1
  Top Layer w10: M2.21 2537.5,787.5 2772.5,787.5 J11.1
NetJ12_1: J12.1 M2.23 | length 234.1
  Top Layer w10: M2.23 2540,990 2760,990 J12.1
NetJ13_1: J13.1 M2.24 | length 363.3
  Top Layer w10: M2.24 2548.27,1085 2568.27,1105 J13.1
NetJ14_1: J14.1 M2.1 | length 349.1
  Top Layer w10: J14.1 2225,1495 M2.1
NetJ15_1: J15.1 M2.4 | length 285.2
  Top Layer w10: J15.1 2160,1210 2190.86,1179.14 2199.14,1179.14 2205,1185 M2.4
NetJ16_1: J16.1 M2.5 | length 597.8
  Top Layer w10: J16.1 2180,1140 M2.5
NetJ17_1: J17.1 M2.6 | length 584.5
  Top Layer w10: J17.1 1678.69,950 1713.69,985 M2.6
NetJ18_1: J18.1 M2.11 | length 551.2
  Top Layer w10: J18.1 1697.5,477.5 2227.5,477.5 M2.11
NetJ19_1: J19.1 M2.12 | length 828.3
  Top Layer w10: J19.1 2201.73,365 2221.73,385 M2.12
NetJ20_1: J20.1 M2.13 | length 475.4
  Top Layer w10: J20.1 2197.03,260 2222.03,285 M2.13
NetJ21_1: J21.1 M2.14 | length 232.1
  Top Layer w10: J21.1 2007.5,182.5 2232.5,182.5 M2.14
NetJ22_1: J22.1 M2.15 | length 290.2
  Top Layer w10: M2.15 2620,100 J22.1
NetJ23_1: J23.1 M2.16 | length 247.1
  Top Layer w10: M2.16 2537.5,282.5 2777.5,282.5 J23.1
NetJ24_1: J24.1 M2.19 | length 301.1
  Top Layer w10: M2.19 2535.91,584.09 2730.91,584.09 J24.1
NetJ25_1: J25.1 M2.9 | length 848.3
  Top Layer w10: J25.1 2201.73,665 2221.73,685 M2.9
NetJ26_1: J26.1 M2.10 | length 535
  Top Layer w10: J26.1 M2.10
NetJ27_1: J27.1 LCD.10 | length 371.9
  Top Layer w10: J27.1 4250.12,1010 4345.12,915 LCD.10
NetJ28_1: J28.1 LCD.8 | length 264.6
  Top Layer w10: J28.1 4387.56,820 LCD.8
NetJ29_1: J29.1 LCD.9 | length 268.1
  Top Layer w10: LCD.9@4585,910 LCD.9@4587.44,912.44 ; LCD.9 LCD.9@4587.44,912.44 ; J29.1 4720,935 4610,935 LCD.9@4587.44,912.44
NetJ30_1: J30.1 LCD.7 | length 254.6
  Top Layer w10: LCD.7 4592.44,810 J30.1
NetJ31_1: J31.1 M2.8 | length 237.1
  Top Layer w10: J31.1 2002.5,787.5 2232.5,787.5 M2.8
NetJ35_1: J35.1 SW1.2 | length 2503.7
  Top Layer w10: J35.1 687.01,4295 1042.01,3940 2125,3940 2125.86,3939.14 2130.86,3944.14 2130.86,4299.14 2081.42,4348.58 SW1.2
NetLCD_3: LCD.3 Pot2.2 | length 2032.7
  Top Layer w10: LCD.3 4650.61,615 4654.88,610.73 4535.73,610.73 4520,595 4520,566.21 4500,546.21 4500,483.79 4508.79,475 4666.1,475 4695.77,504.68 4695.77,583.28 4856.58,744.09 5262.18,744.09 5345.51,827.42 5345.51,1424.49 Pot2.2
NetLCD_4: LCD.4 M2.18 | length 1928.7
  Top Layer w10: M2.18 2675.69,485 2696.6,464.09 4194.21,464.09 4345.12,615 LCD.4
NetLCD_6: LCD.6 M2.17 | length 2229.1
  Top Layer w10: M2.17 4143.9,385 4313.9,555 4451.21,555 4480,583.79 4480,646.21 4465.61,660.61 4406.95,660.61 4392.56,675 LCD.6
NetLCD_11: LCD.11 M2.28 | length 2475.4
  Top Layer w10: M2.28 4003.9,1485 4313.9,1175 4389.13,1175 4646.1,1175 4674.88,1146.21 4674.88,1055 4634.88,1015 LCD.11
NetLCD_12: LCD.12 M2.27 | length 2390.3
  Top Layer w10: M2.27 3975.12,1385 4205.12,1155 4471.21,1155 4480,1146.21 4480,1083.79 4466.82,1070.61 4324.16,1070.61 4310.98,1057.43 4310.98,1049.14 4345.12,1015 LCD.12
NetLCD_13: LCD.13 M2.26 | length 2428.5
  Top Layer w10: M2.26 3253.84,1285 3633.84,905 4283.9,905 4313.9,875 4471.21,875 4489.55,893.33 4489.55,1035.76 4509.17,1055.38 4567.82,1055.38 4587.44,1075 LCD.13
NetLCD_14: LCD.14 M2.25 | length 2138.6
  Top Layer w10: M2.25 2527.5,1192.5 2527.5,1229.53 2490.47,1266.56 2490.47,1303.44 2516.56,1329.53 3323.57,1329.53 3518.1,1135 4372.56,1135 LCD.14
NetM1_2: M1.2 M2.3 | length 3892
  Top Layer w10: v1(1805,1985) 1735,1985 1610,1860 1610,1390.86 1615.86,1385 2135,1385 M2.3 ; v1@2175,3320 1950,3320 1934.14,3335.86 1934.14,3344.14 2075,3485 M1.2
  Bottom Layer w10: v1(1805,1985) 1870,2050 1870,3219.14 1875.86,3225 2160,3225 2165.86,3230.86 2165.86,3304.14 2159.14,3310.86 2159.14,3319.14 2158.28,3320 v1@2145,3320
  other v1: 2170,3320
NetM1_3: M1.3 M2.2 | length 3675.3
  Top Layer w10: v1(2120,1990) 2310,1990 2350,2030 2420,2030 2535,1915 2180,1915 1724.14,1459.14 1724.14,1450.86 1750.31,1424.69 2195.31,1424.69 M2.2 ; v1(2330,3305) 2300,3305 2294.14,3310.86 2294.14,3319.14 2360,3385 M1.3
  Bottom Layer w10: v1(2120,1990) 2340,2210 2340,2747.09 2330,2757.09 v1(2330,3305)
NetM1_5: M1.5 Music.7 | length 1833.9
  Top Layer w10: M1.5 2697.03,3185 2752.5,3129.53 3689.02,3129.53 4062.48,2756.06 4062.48,2703.46 Music.7
NetM1_6: M1.6 Music.6 | length 1995.8
  Top Layer w10: M1.6 2625,3085 2669.53,3040.47 2767.5,3040.47 2807.5,3000.47 v1(2895,3000.47) ; v1@2860,2835 2938.94,2756.06 3868.85,2756.06 3959.67,2665.24 3959.67,2640.92 Music.6
  Bottom Layer w10: v1@2860,2830 2860,2835 2895,2870 v1(2895,3000.47)
  other v1: 2860,2815
NetM1_12: M1.12 Music.5 | length 2127.3
  Top Layer w10: M1.12 2415.47,2440.47 2415.47,2366.56 2441.56,2340.47 2478.44,2340.47 2610,2472.03 2610,2497.97 2741.56,2629.53 2862.07,2629.53 2917.54,2685 3038.06,2685 3058.06,2665 3175.74,2665 3522.16,2318.58 4009.88,2318.58 Music.5
NetM1_13: M1.13 Music.4 | length 1946.3
  Top Layer w10: M1.13 2467.5,2392.5 2467.5,2429.53 2630,2592.03 2630,2989.14 2635.86,2995 2658.43,2995 2712.96,2940.47 3104.99,2940.47 3177.43,2868.03 Music.4
NetM1_25: M1.25 Pot1.2 | length 3253
  Top Layer w10: M1.25 2929.53,3285 2935.43,3290.91 3082.3,3290.91 3094.11,3279.09 3569.09,3279.09 4295,4005 Pot1.2
NetP1_1: P1.1 R25.1 | length 1853.9
  Top Layer w10: P1.1 515,3250 650.86,3385.86 650.86,3394.14 440,3605 440,4484.14 445.86,4490 603.63,4490 763.94,4329.69 769.88,4329.69 788.63,4310.94 R25.1
NetPReset_2: PReset.2 SW1.4 | length 1852.2
  Top Layer w10: SW1.4 2002.01,4171.42 2025.6,4195 v1(2035,4195) ; PReset.2 2520,4580 v1(2605,4665)
  Bottom Layer w10: v1(2035,4195) 2405,4565 2540,4565 2600,4625 2600,4660 v1(2605,4665)
NetR25_2: R25.2 SW1.3 | length 634.5
  Top Layer w10: R25.2 871.37,4299.06 890.12,4280.31 896.06,4280.31 1004.95,4171.42 SW1.3
copper on no net: | length 230.9
  Top Layer w10: 1743.62,4368.58 1810.95,4435.91 1810.95,4458.18 1878.28,4525.51 1896.46,4525.51

## Keep-outs
Keep-Out Layer:
  lines w10: -10,25 -5,30 -5,60 65,-10 7905,-10 7930,15 7930,4940 7935,4945 3950,4945 3945,4940 -10,4940 -10,25